# Altium PCB PCB1.PcbDoc
Units mil, origin at the board's own origin, x right, y up, seen from the top; angles counter-clockwise.
Board outline 1605 x 1020 mil, 4 copper layers (Top Layer, Int1 (GND), Int2 (PWR), Bottom Layer), stack 62.449 mil thick; 38 components, 33 nets, 142 pads, 58 vias.
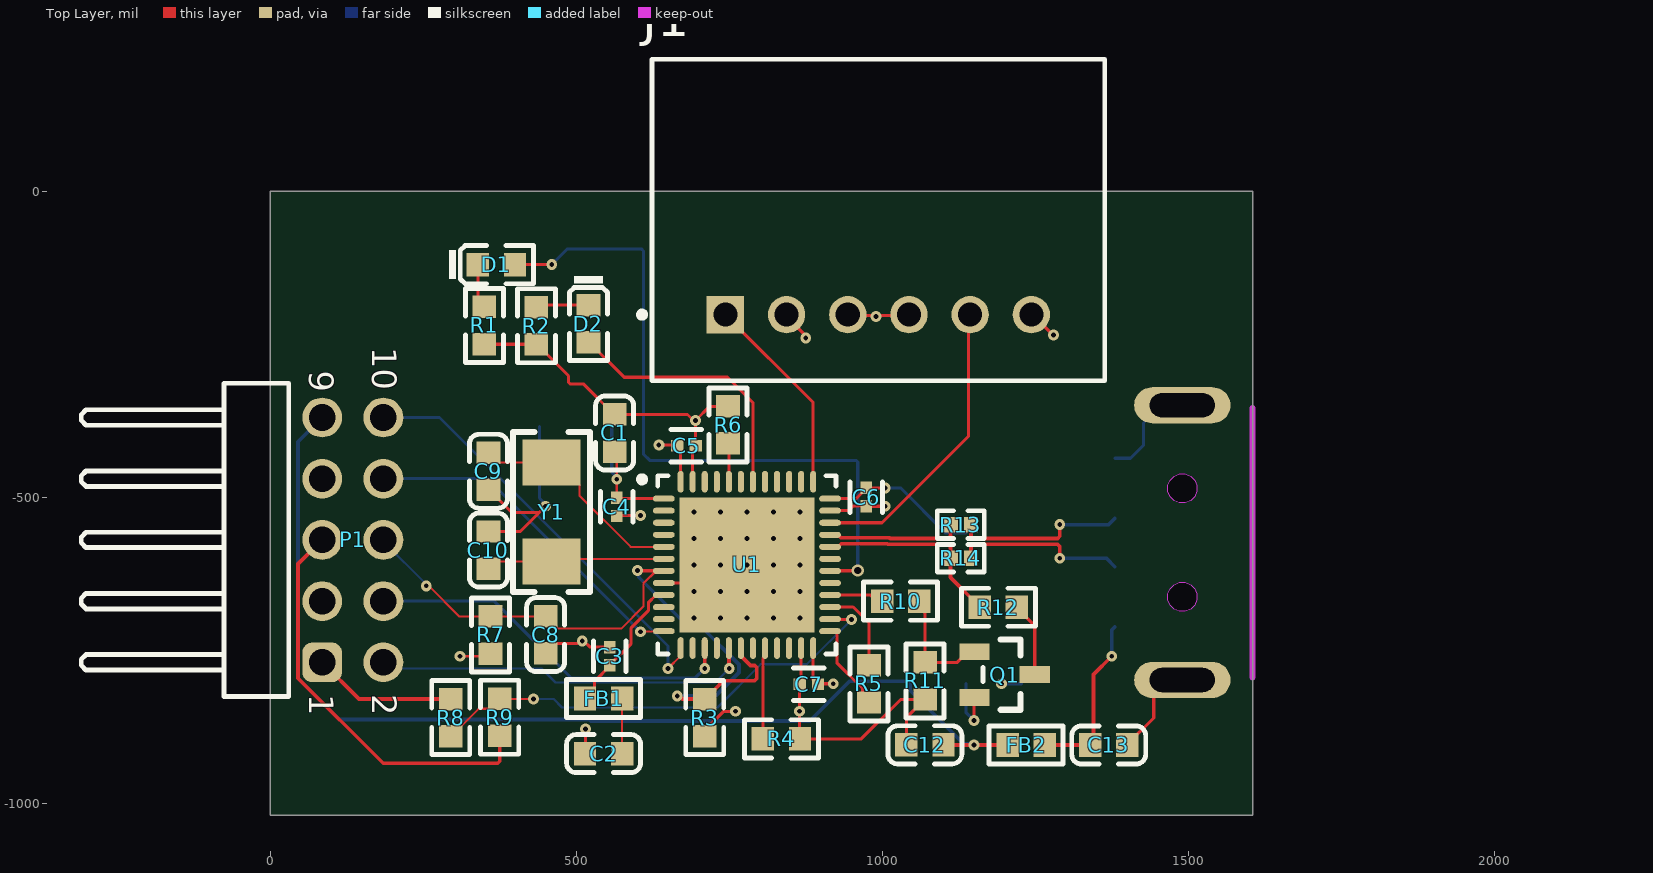
[diagram p0: Top Layer view]
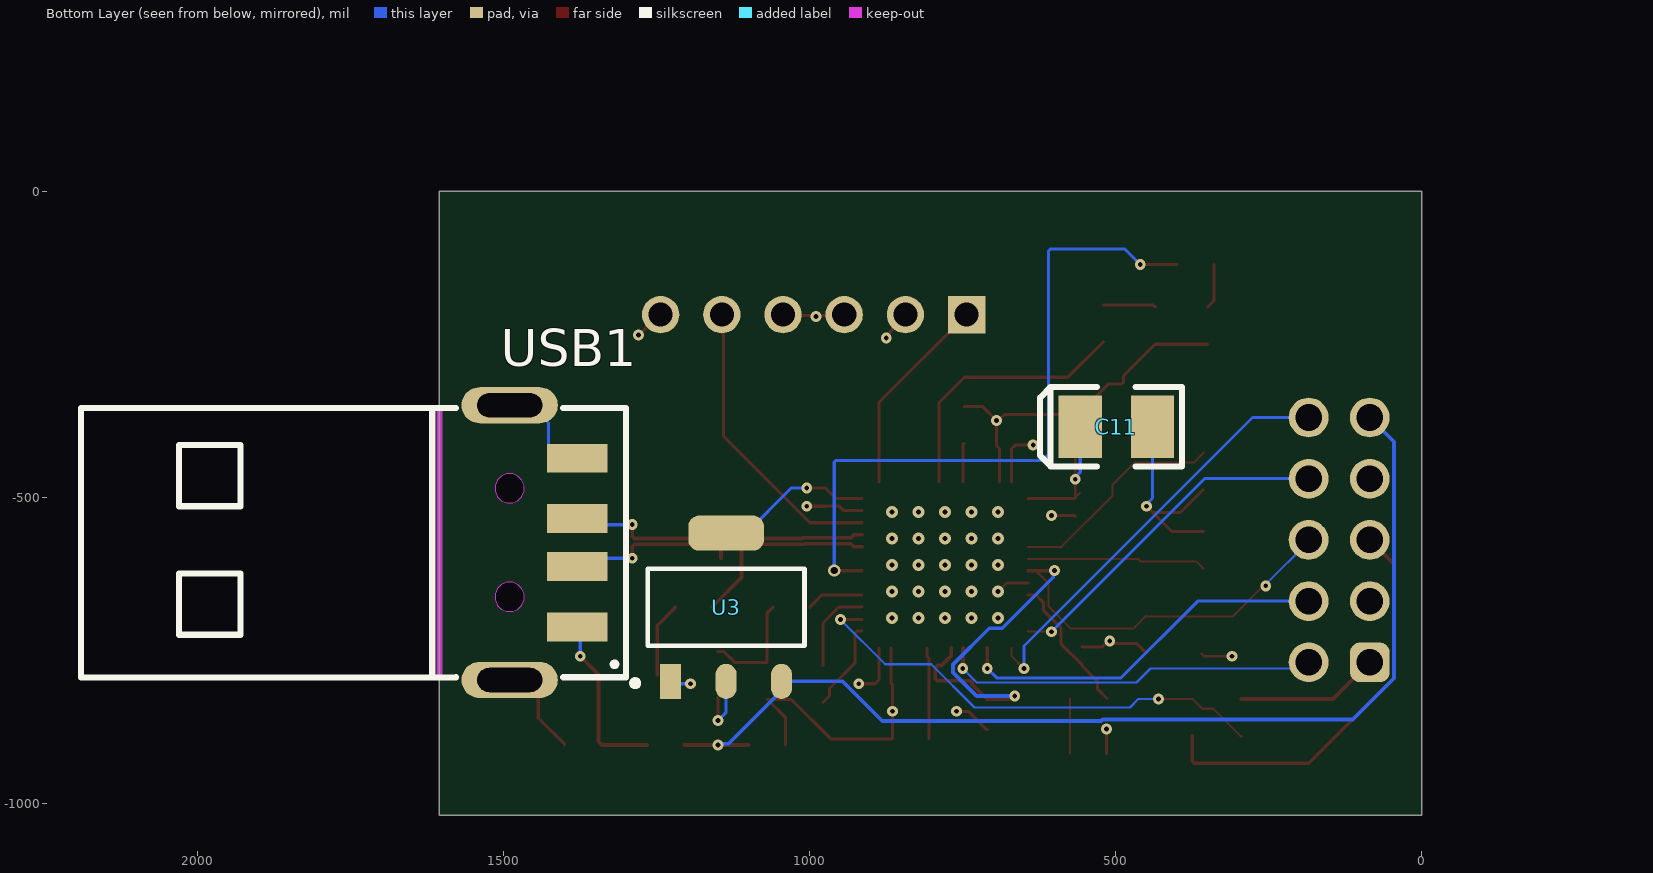
[diagram p1: Bottom Layer view, seen from below]
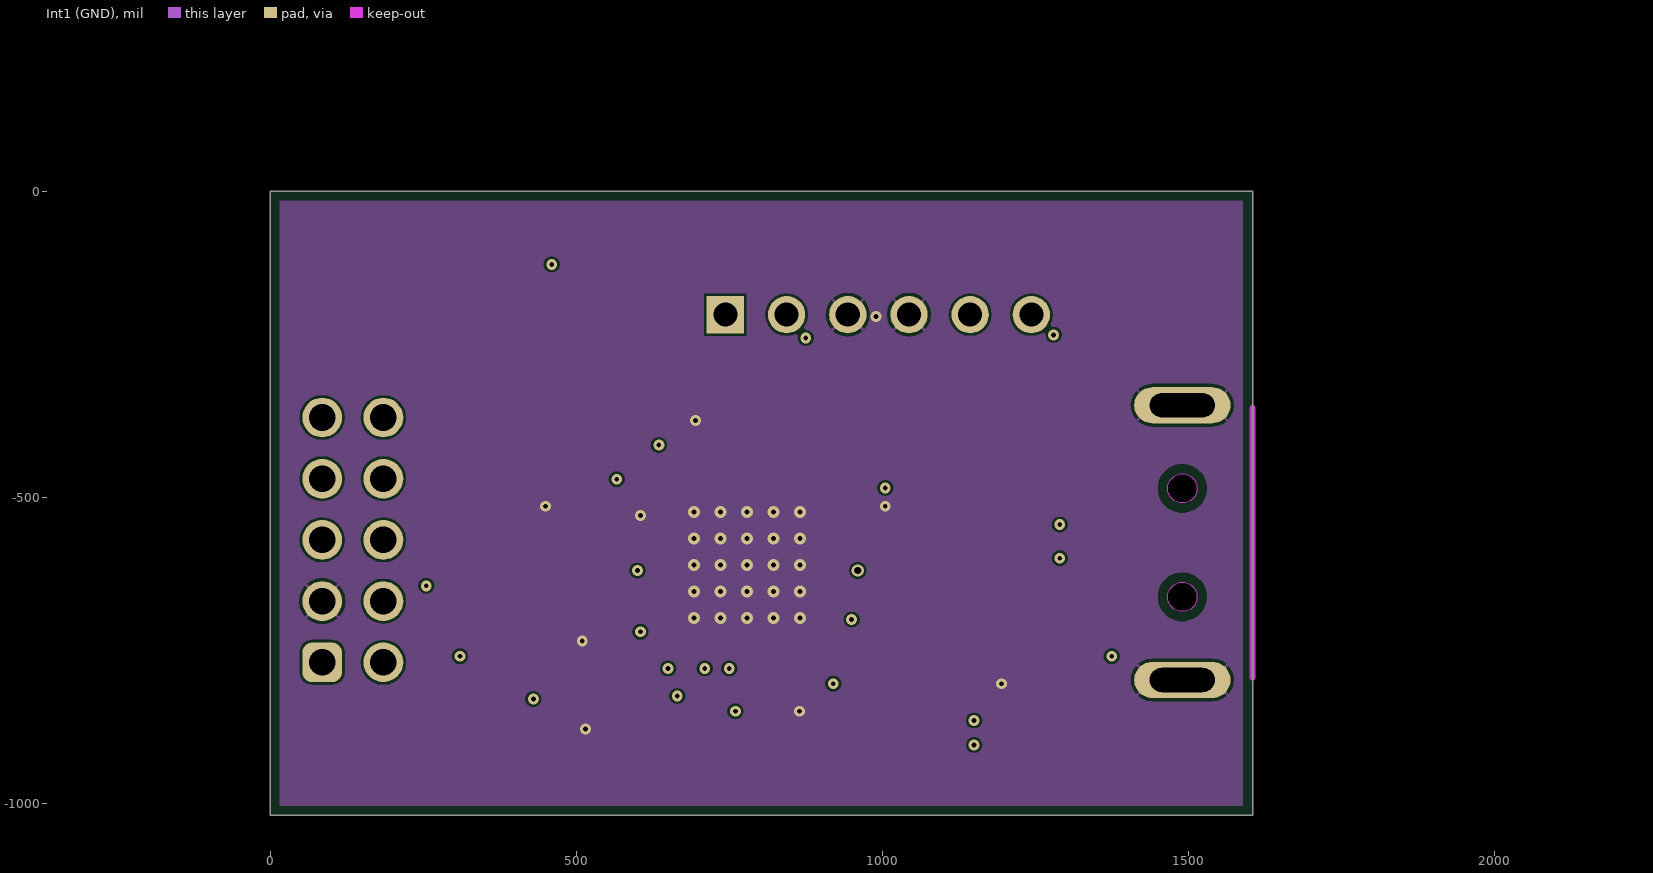
[diagram p2: Int1 (GND)]
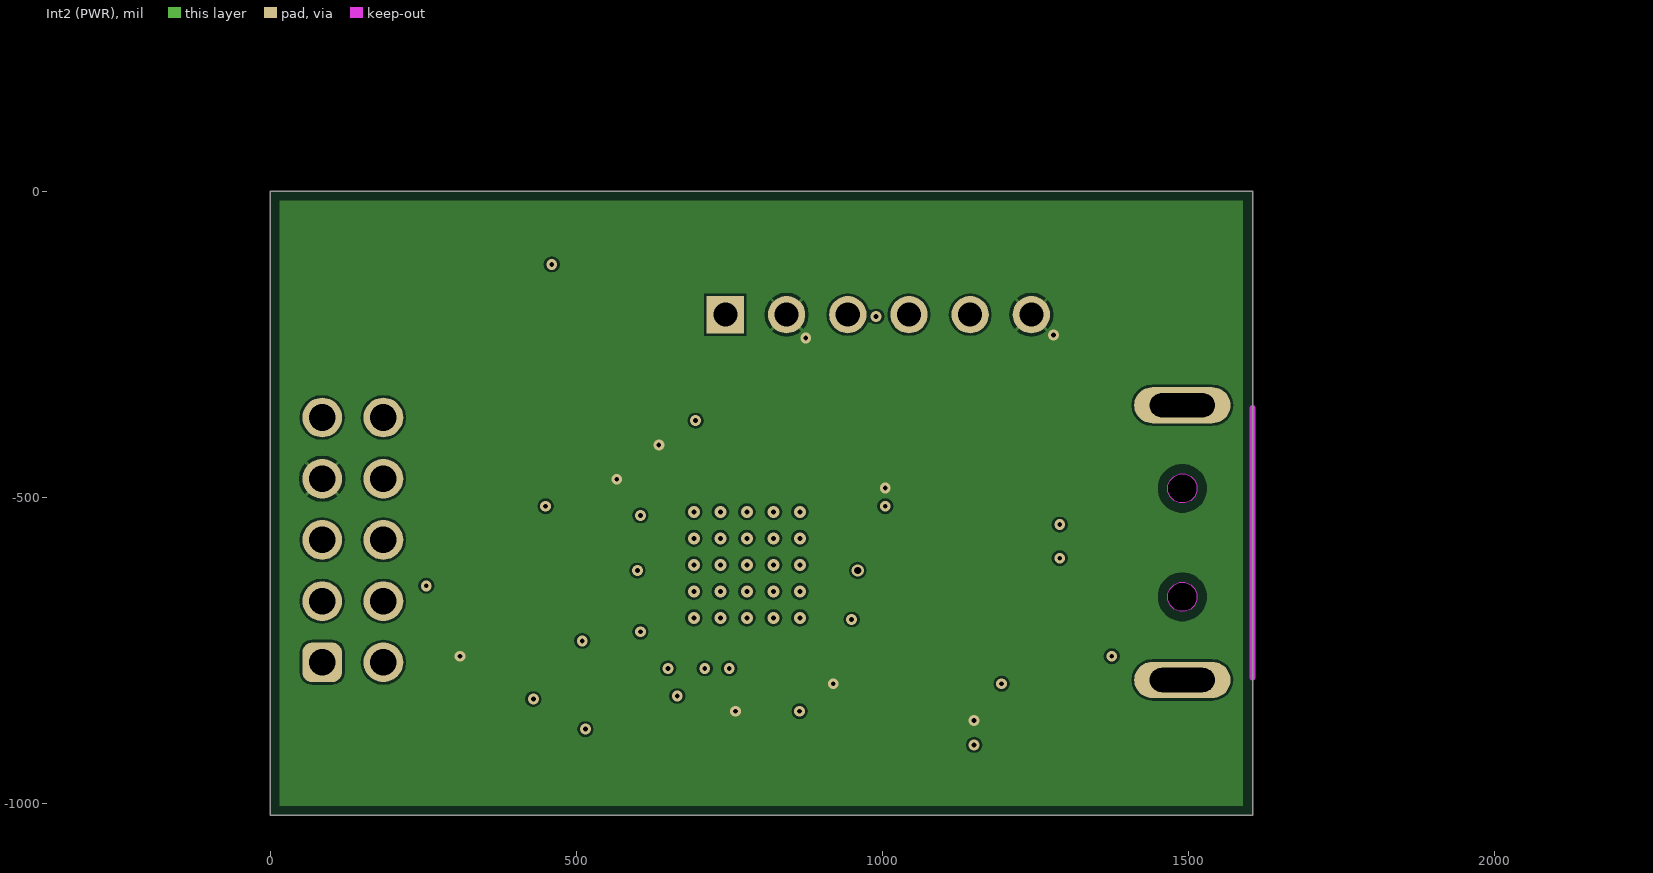
[diagram p3: Int2 (PWR)]
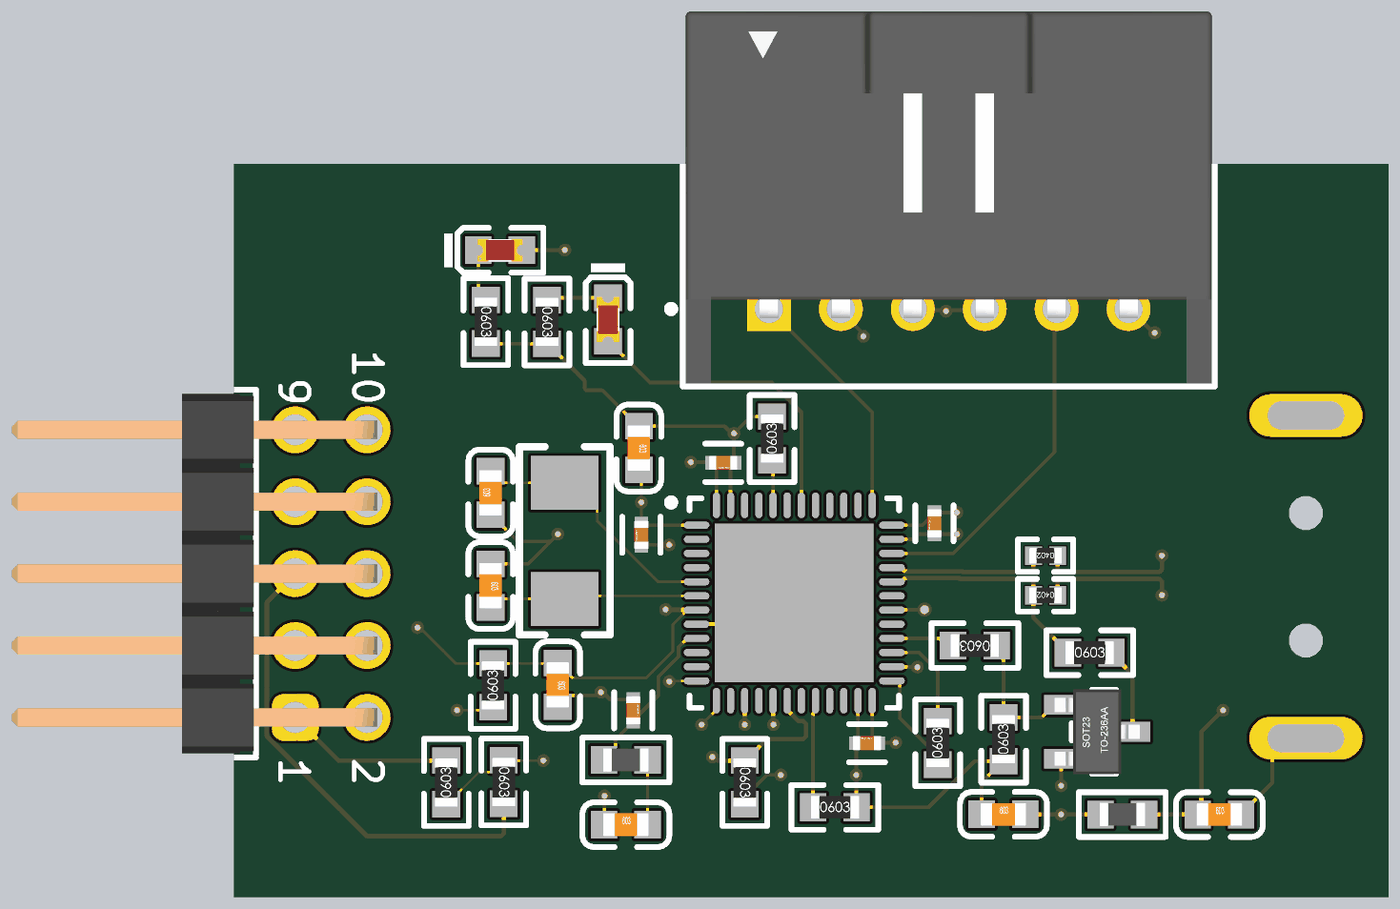
[diagram p4: 3D render of the assembled board from above, using the file's embedded part models]

## Layer stack, top to bottom
Top Solder: solder mask 0.6, SM-001, Dk 3.8
Top Layer: signal copper 1.378
Dielectric 1: prepreg 8.284, PP-017, Dk 4.5
Int1 (GND): signal copper 0.598
Dielectric 2: core 41.929, Core-039, Dk 4.48
Int2 (PWR): signal copper 0.598
Dielectric 3: prepreg 8.284, PP-017, Dk 4.5
Bottom Layer: signal copper 1.378
Bottom Solder: solder mask 0.6, SM-001, Dk 3.8

## Board outline
0,-1020 0,0 1605,0 1605,-1020

## Design rules (kind name [scope] priority, off if disabled: settings)
BoardOutlineClearance [All] p1: gap=15.75 ignorepadtopadclearanceinfootprint=FALSE
Clearance "Stitching No Net" [IsStitchingVia and InNet('No Net') vs (IsVia and (Not IsStitchingVia)) Or IsPad] p1: gap=5 ignorepadtopadclearanceinfootprint=FALSE
Clearance [All] p2: gap=3.94 ignorepadtopadclearanceinfootprint=TRUE except(0: Arc-Text Track-Text SMDPad-Text THPad-Text Via-Text Fill-Text Poly-Text Region-Text Text-Text; 3.5: Arc-Arc Arc-Track Track-Track)
ComponentClearance [All] p1: gap=0 collisioncheckmode=3 verticalgap=10 showdistances=FALSE checkcomponentboundary=TRUE
DiffPairsRouting usb [All] p1: maxlimit=5 minlimit=3.5 mostfreqgap=5 toplayer_maxgap=3.5 toplayer_prefgap=3.5 toplayer_minwidth=6.04 toplayer_maxwidth=6.04 toplayer_prefwidth=6.04 midlayer1_mingap=5 midlayer1_minwidth=6.05 midlayer1_maxwidth=6.05 midlayer1_prefwidth=6.05 midlayer2_mingap=5 midlayer2_minwidth=6.05 midlayer2_maxwidth=6.05 midlayer2_prefwidth=6.05 bottomlayer_maxgap=3.5 bottomlayer_prefgap=3.5 bottomlayer_minwidth=6.04 bottomlayer_maxwidth=6.04 bottomlayer_prefwidth=6.04 impedanceprofiledriven=TRUE impedanceprofileid={D8EC2194-7932-445D-939A-5E486EFC36D5} impedanceprofilevalue=90.000000 maxuncoupledlength=500
DiffPairsRouting [All] p2: maxlimit=10 minlimit=10 mostfreqgap=10 toplayer_minwidth=15 toplayer_maxwidth=15 toplayer_prefwidth=15 midlayer1_minwidth=15 midlayer1_maxwidth=15 midlayer1_prefwidth=15 midlayer2_minwidth=15 midlayer2_maxwidth=15 midlayer2_prefwidth=15 bottomlayer_minwidth=15 bottomlayer_maxwidth=15 bottomlayer_prefwidth=15 maxuncoupledlength=500
HoleSize [All] p1: absolutevalues=TRUE maxlimit=248.03 minlimit=7.87 maxpercent=80.000 minpercent=20.000
MinimumAnnularRing [All] p1: minimumring=5.91
MinimumSolderMaskSliver [All] p1: minsoldermaskwidth=3.94
PlaneClearance [All] p1: clearance=5
PlaneConnect [All] p1: pad.planeconnectstyle=Relief pad.reliefexpansion=5 pad.reliefentries=4 pad.reliefconductorwidth=5 pad.reliefairgap=5 via.planeconnectstyle=Direct via.reliefexpansion=20 via.reliefentries=4 via.reliefconductorwidth=10 via.reliefairgap=10
PolygonConnect [All] p1: thpad.connectstyle=Relief thpad.reliefconductorwidth=5 thpad.reliefentries=4 thpad.polygonreliefangle="45 Angle" thpad.airgapwidth=5 smdpad.connectstyle=Relief smdpad.reliefconductorwidth=5 smdpad.reliefentries=4 smdpad.polygonreliefangle="90 Angle" smdpad.airgapwidth=5 via.connectstyle=Direct via.reliefconductorwidth=10 via.reliefentries=4 via.polygonreliefangle="90 Angle" via.airgapwidth=10
RoutingVias [All] p1: holewidth=7.87 width=17.72 viastyle="Through Hole" minholewidth=7.87 minwidth=17.72 maxholewidth=39.37 maxwidth=78.74
SilkToSilkClearance [All] p1: silktosilkclearance=5.91
SilkToSolderMaskClearance [IsPad] p1: minsilkscreentomaskgap=5.91 clearancetoexposedcopper=TRUE
SolderMaskExpansion [All] p1: expansion=4 istentingtop=FALSE
Width [All] p1: maxlimit=100 minlimit=3.5 preferedwidth=5 midlayer1_prefwidth=3.5 midlayer2_prefwidth=3.5 minimp=50.000000 maximp=50.000000 favimp=50.000000
22 further rules are at their usual default settings.

## Classes and differential pairs
differential pair USB: +USB_P -USB_N
differential pair USB_CONN: +USB_CONN_P -USB_CONN_N

## Components (designator, comment, footprint, x,y, rotation, side; value= is the part's Value field where it differs from the comment)
C1 "10uF" 0603_C 562.75,-395.32 r270 top
C2 "1uF" 0603_C 544.68,-919.1 r0 top
C3 "100nF" FP-CL779-IPC_C 555,-760.1 r90 top
C4 "100nF" FP-CL779-IPC_C 566.22,-516.02 r270 top
C5 "100nF" FP-CL779-IPC_C 680.1,-415.93 r0 top
C6 "100nF" FP-CL779-IPC_C 973.79,-500 r270 top
C7 "100nF" FP-CL779-IPC_C 880.1,-805.72 r180 top
C8 "100nF" 0603_C 450,-724.68 r270 top
C9 "20pF" 0603_C 356.66,-457.86 r90 top
C10 "20pF" 0603_C 356.66,-586.61 r270 top
C11 "100uF" CASE-B_3528 499.05,-385 r0 bottom
C12 "10uF" 0603_C 1069.68,-904.73 r0 top
C13 "100nF" 0603_C 1370,-905 r0 top
D1 "红灯 0603" 0603_LED_S1 369.68,-120.27 r0 top
D2 "蓝灯 0603" 0603_LED_S1 520,-216.7 r270 top
FB1 "600Ω@100MHz" 0603_L 544.69,-829.1 r180 top
FB2 "600Ω@100MHz" 0603_L 1235,-905 r180 top
J1 "90136-2106" FP-90136-2106-MFG 993.66,-47.22 r180 top
P1 "61301021021" 61301021021 -22.48,-570 r270 top
Q1 "SS8550 Y2" SOT-23(SOT-23-3) 1200,-790 r180 top
R1 "10KΩ" 0603_R 350,-219.68 r270 top
R2 "10KΩ" 0603_R 435,-220 r270 top
R3 "10KΩ" 0603_R 710,-860.31 r270 top
R4 "10KΩ" 0603_R 835.31,-895 r0 top
R5 "100Ω" 0603_R 978.32,-805.32 r90 top
R6 "10KΩ" 0603_R 748.07,-382.08 r90 top
R7 "10KΩ" 0603_R 360,-725.32 r90 top
R8 "100Ω" 0603_R 295,-860.32 r90 top
R9 "100Ω" 0603_R 375,-859.68 r270 top
R10 "1.5KΩ" 0603_R 1030,-670 r180 top
R11 "1.5KΩ" 0603_R 1070,-800.32 r90 top
R12 "1.5KΩ" 0603_R 1189.68,-680 r0 top
R13 "22Ω" 0402_R 1128.27,-545 r180 top
R14 "22Ω" 0402_R 1128.27,-600 r180 top
U1 "STM32F103CBU6" STM-UFQFPN48_N 778.9,-610.83 r0 top
U3 "TLV1117-33CDCYR" FP-DCY0004A-IPC_C 1136.65,-680 r90 bottom
USB1 "U217-041N-4BV81" USB-A-SMD_U217-041N-4BV81 1435.12,-574.36 r270 bottom
Y1 "8MHz 20pF" SMD-5032_2P 459.7,-524.4 r270 top

## Footprints (in the part's own frame and the unit in brackets; to place one, negate y for a bottom-side part, rotate by r counter-clockwise, add the part's x,y. Pads: shape width x height; smd on the part's side, far side on the other; paste and mask are expansions set on the pad)
0402_R [mm]
  rect 0.6x0.65 smd mask+0.051: 1(-0.425,0) 2(0.425,0)
  silkscreen extent -0.97,-0.58 0.97,0.58, body extent -0.57,-0.27 0.58,0.28, height 0.41
0603_C [mm]
  rect 0.93x0.98 smd: 1(-0.77,0) 2(0.77,0)
  silkscreen extent -1.53,-0.79 1.54,0.79, body extent -0.8,-0.4 0.8,0.4, height 0.3
0603_L [mm]
  rect 0.93x0.98 smd: 1(-0.77,0) 2(0.77,0)
  silkscreen extent -1.53,-0.79 1.54,0.79, body extent -0.82,-0.41 0.83,0.41, height 0.46
0603_LED_S1 [mm]
  rect 0.93x0.98 smd: A(0.77,0) K(-0.77,0)
  silkscreen extent -1.97,-0.79 1.54,0.79, body extent -0.8,-0.4 0.8,0.4, height 0.6
0603_R [mm]
  rect 0.93x0.98 smd: 1(-0.77,0) 2(0.77,0)
  silkscreen extent -1.53,-0.79 1.54,0.79, body extent -0.85,-0.4 0.85,0.4, height 0.56
61301021021 [mm] "Pin Header, pitch 2.54 mm, THT, Angled, dual row, 10p"
  rrect50% 1.65x1.65 hole 1.1: 1(5.08,2.73)
  round 1.65 hole 1.1: 2(5.08,5.27) 3(2.54,2.73) 4(2.54,5.27) 5(0,2.73) 6(0,5.27) 7(-2.54,2.73) 8(-2.54,5.27) 9(-5.08,2.73) 10(-5.08,5.27)
  silkscreen extent -6.5,-7.27 6.5,1.35, body extent -6.35,-7.27 6.35,5.63, height 5.12
CASE-B_3528 [mm]
  rect 1.8x2.6 smd: 1(1.5,0) 2(-1.5,0)
  silkscreen extent -2.73,-1.65 3.16,1.65, body extent -1.85,-1.47 1.85,1.46, height 2.03
FP-90136-2106-MFG [mm]
  rect 1.55x1.55 hole 1 paste-1000 mask+0: 1(6.35,3.93)
  round 1.55 hole 1 paste-1000 mask+0: 2(3.81,3.93) 3(1.27,3.93) 4(-1.27,3.93) 5(-3.81,3.93) 6(-6.35,3.93)
  silkscreen extent -9.4,-6.67 9.93,6.67, body extent -9.5,-6.77 9.5,6.77, height 0.25
FP-CL779-IPC_C [mil]
  rect 20.29x18.6 smd paste+0 mask+0: 1(-14.9,0) 2(14.9,0)
  silkscreen extent -25,-27 25,27, body extent -29,-15 29,15, height 10
FP-DCY0004A-IPC_C [mm]
  rect 1.454x0.873 smd paste+0 mask+0: 1(-3.075,2.3)
  rrect100% 1.454x0.873 smd paste+0 mask+0: 2(-3.075,0) 3(-3.075,-2.3)
  rrect60% 1.454x3.132 smd paste+0 mask+0: 4(3.075,0)
  silkscreen extent -3.27,-3.25 1.6,3.9, body extent -3.5,-3.25 3.5,3.25, height 1.8
SMD-5032_2P [mm]
  rect 1.9x2.4 smd: 1(-2.05,0) 2(2.05,0)
  silkscreen extent -3.32,-1.6 3.32,1.6
SOT-23(SOT-23-3) [mm]
  rect 1.25x0.7 smd: 1(1.25,-0.95) 2(1.25,0.95) 3(-1.25,0)
  silkscreen extent -0.65,-1.46 0.9,1.46, body extent -1.5,-1.5 1.5,1.5, height 1.3
STM-UFQFPN48_N [mm] "QFN, 48-Leads, Body 7.1x7.1mm, Pitch 0.5mm, Thermal Pad 5.6x5.6mm, IPC Medium Density"
  oval 0.9x0.25 smd: 1(-3.45,2.75) 2(-3.45,2.25) 3(-3.45,1.75) 4(-3.45,1.25) 5(-3.45,0.75) 6(-3.45,0.25) 7(-3.45,-0.25) 8(-3.45,-0.75) 9(-3.45,-1.25) 10(-3.45,-1.75) 11(-3.45,-2.25) 12(-3.45,-2.75) 25(3.45,-2.75) 26(3.45,-2.25) 27(3.45,-1.75) 28(3.45,-1.25) 29(3.45,-0.75) 30(3.45,-0.25) 31(3.45,0.25) 32(3.45,0.75) 33(3.45,1.25) 34(3.45,1.75) 35(3.45,2.25) 36(3.45,2.75)
  oval 0.25x0.9 smd: 13(-2.75,-3.45) 14(-2.25,-3.45) 15(-1.75,-3.45) 16(-1.25,-3.45) 17(-0.75,-3.45) 18(-0.25,-3.45) 19(0.25,-3.45) 20(0.75,-3.45) 21(1.25,-3.45) 22(1.75,-3.45) 23(2.25,-3.45) 24(2.75,-3.45) 37(2.75,3.45) 38(2.25,3.45) 39(1.75,3.45) 40(1.25,3.45) 41(0.75,3.45) 42(0.25,3.45) 43(-0.25,3.45) 44(-0.75,3.45) 45(-1.25,3.45) 46(-1.75,3.45) 47(-2.25,3.45) 48(-2.75,3.45)
  rect 5.6x5.6 smd: 49(0,0)
  silkscreen extent -4.47,-3.7 3.7,3.7, body extent -3.55,-3.55 3.55,3.55, height 0.6
USB-A-SMD_U217-041N-4BV81 [mm]
  rect 1.2x2.5 smd paste-100 mask+0.051: 1(3.5,1.4) 2(1,1.4) 3(-1,1.4) 4(-3.5,1.4)
  oval 1.5x4 hole 1 slot 2.7 at 90 deg: 5(-5.7,-1.4) 6(5.7,-1.4)
  Keep-Out Layer board cut-out: 2.85,-1.4 2.85,-1.281 2.759,-1.06 2.59,-0.891 2.369,-0.8 2.131,-0.8 1.91,-0.891 1.741,-1.06 1.65,-1.281 1.65,-1.4 1.65,-1.519 1.741,-1.74 1.91,-1.909 2.131,-2 2.369,-2 2.59,-1.909 2.759,-1.74 2.85,-1.519 2.85,-1.4 2.85,-1.4
  Keep-Out Layer board cut-out: -1.65,-1.4 -1.65,-1.281 -1.741,-1.06 -1.91,-0.891 -2.131,-0.8 -2.369,-0.8 -2.59,-0.891 -2.759,-1.06 -2.85,-1.281 -2.85,-1.4 -2.85,-1.519 -2.759,-1.74 -2.59,-1.909 -2.369,-2 -2.131,-2 -1.91,-1.909 -1.741,-1.74 -1.65,-1.519 -1.65,-1.4 -1.65,-1.4
  Keep-Out Layer lines w0.254: 5.588,-4.318 -5.588,-4.318 5.588,-4.318
  Multi-Layer pour cut-out: 2.85,-1.4 2.85,-1.281 2.759,-1.06 2.59,-0.891 2.369,-0.8 2.131,-0.8 1.91,-0.891 1.741,-1.06 1.65,-1.281 1.65,-1.4 1.65,-1.519 1.741,-1.74 1.91,-1.909 2.131,-2 2.369,-2 2.59,-1.909 2.759,-1.74 2.85,-1.519 2.85,-1.4 2.85,-1.4
  Multi-Layer pour cut-out: -1.65,-1.4 -1.65,-1.281 -1.741,-1.06 -1.91,-0.891 -2.131,-0.8 -2.369,-0.8 -2.59,-0.891 -2.759,-1.06 -2.85,-1.281 -2.85,-1.4 -2.85,-1.519 -2.759,-1.74 -2.59,-1.909 -2.369,-2 -2.131,-2 -1.91,-1.909 -1.741,-1.74 -1.65,-1.519 -1.65,-1.4 -1.65,-1.4
  silkscreen extent -5.59,-19.18 5.6,3.43

## Part data
C1 C12: library part "0603 10uF (106) 10% 10V", "贴片电容", Package=0603, SuppliersPartNumber=C19702, ComponentLink1Description=供应商链接, ComponentLink1URL=http://www.szlcsc.com/product/details_20411.html, Supplier=LC
C2: library part "0603 1uF (105) 10% 50V", "贴片电容1uF (105) 10% 50V CL10A105KB8NNNC", Package=0603, SuppliersPartNumber=C15849, ComponentLink1Description=供应商链接, ComponentLink1URL=http://www.szlcsc.com/product/details_16531.html, Supplier=LC
C3 C4 C5 C6 C7: library part CMP-13271-002336-1, "CL05B104KB54PNC Cap Ceramic 100nF 50V X7R ±10% SMD 0402 +125°C Paper T/R"
C8 C13: library part "0603 100nF (104) 10% 50V", "贴片电容", Package=0603, SuppliersPartNumber=C14663, ComponentLink1Description=供应商链接, ComponentLink1URL=http://www.szlcsc.com/product/details_15331.html, Supplier=LC
C9 C10: library part "0603 20pF (200) 5% 50V", "贴片电容", Package=0603, SuppliersPartNumber=C1648, ComponentLink1Description=供应商链接, ComponentLink1URL=http://www.szlcsc.com/product/details_2000.html, Supplier=LC
C11: library part "3528 100uF (107) 10% 6.3V", "钽电容", Package=3528, SuppliersPartNumber=C16133, ComponentLink1Description=供应商链接, ComponentLink1URL=http://www.szlcsc.com/product/details_16815.html, Supplier=LC
D1: library part "0603 红灯", "发光二极管", Package=0603, SuppliersPartNumber=C2286, ComponentLink1Description=供应商链接, ComponentLink1URL=http://www.szlcsc.com/product/details_2659.html, Supplier=LC
D2: library part "0603 蓝灯", "发光二极管", Package=0603, SuppliersPartNumber=C72041, ComponentLink1Description=供应商链接, ComponentLink1URL=http://www.szlcsc.com/product/details_73150.html, Supplier=LC
FB1 FB2: library part "0603 600Ω 25% 100MHz", "贴片磁珠GZ1608D601TF", Package=0603, SuppliersPartNumber=C1002, ComponentLink1Description=供应商链接, ComponentLink1URL=http://www.szlcsc.com/product/details_1354.html, Supplier=LC
J1: library part CMP-04776-000069-1, "CONN HEADER R/A 6POS 2.54MM", Current Rating=3A, Manufacturer=Molex, Package=0, Temperature="-55°C to +125°C", Temperature Range High=+125°C, Temperature Range Low=-55°C, Voltage Rating=350V, Automotive=No, Category=Conn, ComponentLink2Description=Datasheet, ComponentLink2URL=http://www.molex.com/webdocs/datasheets/pdf/en-us/0901362106_PCB_HEADERS.pdf, Conn Gender=Male, Conn Orientation="Right Angle", Contact Material=Tin,Nickel, Device Class L1=Connectors, Device Class L2="Headers and Wire Housings", Device Class L3=unset, Digikey Description="CONN HEADER R/A 6POS 2.54MM", Footprint Url=https://www.molex.com/pdm_docs/sd/901362106_sd.pdf, Height=7.51mm, Lead Free=Yes, Manufacturer Part Number=90136-2106, Mouser Description="Headers & Wire Housings 2.54MM CGRIDIII HDR 6P R/A SR SHRD TIN", Number Of Contacts=6, Number Of Rows=1, Octopart=https://octopart.com/90136-2106-molex-655558, Pitch=2.54mm, RoHS=TRUE
P1: library part CMP-1502-01083-2, Color=Black, Contact Resistance=20mΩ, Current Rating=3A, Flammability Rating="UL94 V-0", Insulation Resistance=1GΩ, Max Operating Temperature=125°C, Min Operating Temperature=-40°C, Operating Supply Voltage=250V, Connector Type="Male Pin", Contact Gender=Male, Contact Material=Copper, Contact Mating Length=5.9944mm, Contact Plating=Gold, Gender=Male, Height=2.54mm, Housing Material=PBT, Insulation=Insulated, Lead Pitch=2.54mm, Length=12.7mm, Mount="Through Hole", NexarPartId=18818162, Number Of Contacts=10, Number of Pins=10, Number of Positions=10, Number Of Rows=2, Orientation="Right Angle", Packaging=Bulk, Pitch=2.54mm, REACH SVHC=Unknown, RoHS=Compliant, Row Spacing=2.54mm, Termination="Through Hole", Voltage Rating=250V, Width=12.7mm
Q1: library part "SOT-23 SS8550 Y2", "三极管", Package=SOT-23, SuppliersPartNumber=C8542, ComponentLink1Description=供应商链接, ComponentLink1URL=http://www.szlcsc.com/product/details_9037.html, Supplier=LC
R1 R2 R6 R7: library part "0603 10KΩ (1002) 1%", "贴片电阻", Package=0603, SuppliersPartNumber=C25804, ComponentLink1Description=供应商链接, ComponentLink1URL=http://www.szlcsc.com/product/details_26547.html, Supplier=LC
R3 R4: library part "0603 10KΩ (1002) 1%", "贴片电阻 0603WAF1002T5E", Package=0603, SuppliersPartNumber=C25804, ComponentLink1Description=供应商链接, ComponentLink1URL=http://www.szlcsc.com/product/details_26547.html, Supplier=LC
R5 R8 R9: library part "0603 100Ω (1000) 1%", "贴片电阻", Package=0603, SuppliersPartNumber=C22775, ComponentLink1Description=供应商链接, ComponentLink1URL=http://www.szlcsc.com/product/details_23502.html, Supplier=LC
R10 R11 R12: library part "0603 1.5KΩ (1501) 1%", "贴片电阻", Package=0603, SuppliersPartNumber=C22843, ComponentLink1Description=供应商链接, ComponentLink1URL=http://www.szlcsc.com/product/details_23570.html, Supplier=LC
R13 R14: library part "0402 22Ω (22R0) 1%", "贴片电阻", Package=0402, SuppliersPartNumber=C25092, ComponentLink1Description=供应商链接, ComponentLink1URL=http://www.szlcsc.com/product/details_25835.html, Supplier=LC
U1: library part CMP-0237-00051-3, "ARM Cortex-M3 32-bit MCU, 128 KB Flash, 20 KB Internal RAM, 37 I/Os, 48-pin UFQFPN, -40 to 85 degC, Tray", I/Os (High Current)=37, Operating Frequency(F) (Processor speed) (MHz)=72, Supply Voltage(Vcc) min (V)=2, A/D Converter="2x12-bit (10 Channel)", ComponentLink1Description="Manufacturer URL", ComponentLink1URL=http://www.st.com/web/en/home.html, ComponentLink2Description=Datasheet, ComponentLink2URL=http://www.st.com/st-web-ui/static/active/en/resource/technical/document/datasheet/CD00161566.pdf, ComponentLink3Description="Package Specification", ComponentLink3URL=http://www.st.com/st-web-ui/static/active/en/resource/technical/document/data_brief/DM00071938.pdf, Core="ARM Cortex-M3", DatasheetVersion="Rev. 16", FLASH Size (Prog) (kB)=128, Internal RAM Size (kB)=20, Mounting Technology="Surface Mount", PackageDescription="48-Pin Ultra Thin Fine Pitch Quad Flat No-Lead, 7 x 7 x 0.6 mm Body, 0.5 mm Pitch, Exposed Pad", PackageReference=UFQFPN48, PackageVersion="Rev. 1, 04/2013", Packing=Tray, PartNumber=STM32F103CBU6
U3: library part CMP-04917-000080-1, "IC REG LIN 3.3V 800MA SOT223-4"
USB1: Current Rating - Power (Max)=1.5A, JLCPCB Part Class="Extended Part", LCSC Part Name="Type-A 公头 沉板", Manufacturer="XKB Connectivity(中国星坤)", Operating Temperature Range=-40℃~+85℃, Welding Temperature (Max)=-, Add into BOM=yes, Connector Type=Type-A, Contact Material=黄铜, Contact Plating=金, Convert to PCB=yes, Datasheet=https://atta.szlcsc.com/upload/public/pdf/source/20211015/D42E73CBE112FBE216C7DAC502068881.pdf, Device=U217-041N-4BV81, Gender=公头, Manufacturer Part=U217-041N-4BV81, Mounting Style=沉板, Name=U217-041N-4BV81, Number Of Contacts=4P, Number of Ports=1, Standard="USB 2.0", Supplier=LCSC, Supplier Footprint=SMD, Supplier Part=C319178, Symbol=U217-04XN-XXR84
Y1: library part "SMD-5032_2P 8MHz 20ppm 20pF", "贴片晶振", Package=SMD-5032_2P, SuppliersPartNumber=C115962, ComponentLink1Description=供应商链接, ComponentLink1URL=http://www.szlcsc.com/product/details_117214.html, Supplier=LC

## Via types
v1: diameter 17.72, hole 7.87, Top Layer to Bottom Layer, tented both sides, 32 vias
v2: diameter 19.68, hole 7.87, Top Layer to Bottom Layer, 25 vias
v3: diameter 19.68, hole 11.81, Top Layer to Bottom Layer, tented both sides, 1 vias

## Nets (pads, with @x,y where several pads share a name; then routed paths per layer and width w, separated by ;. In a path a pad name is that pad's centre, name@x,y a point inside that pad or via, vN(x,y) a via of type N, cw(c..) or ccw(c..) an arc to the next point about the centre after c; other vN are vias at no path point)
3v3: C1.2 C4.1 C5.1 C6.1 C7.1 C11.1 J1.2 J1.6 P1.7 Q1.2 R3.2 R7.1 U1.1 U1.24 U1.36 U1.48 U3.2 U3.4 | length 1016.6
  Top Layer w3.5: v1(310,-760) 355.63,-760 R7.1 ; C4.1@558.67,-493.47 C4.1@566.22,-501.02 ; C1.2 566.22,-429.11 v1(566.22,-470.93) C4.1@566.22,-501.02 ; C4.1@567.66,-502.56 C4.1 C4.1@566.22,-501.02 ; U1.48 U1.48@671.84,-473.79
  Top Layer w5: C4.1@566.22,-501.02 567.77,-502.56 U1.1 ; v1(635,-415) 664.26,-415 C5.1 670.63,-421.37 U1.48 ; R3.2@710,-879.89 710.98,-879.89 740.88,-850 v1(760,-850) ; J1.2 843.66,-205.31 875,-236.64 v1(875,-240) ; U1.24 887.17,-798.73 893.44,-805 v1(920,-805) ; U1.36 957.17,-502.56 973.79,-485.94 C6.1 973.89,-485 v1(1005,-485) ; v1(1150,-865) 1150,-828.19 Q1.2 ; J1.6 1245.31,-201.95 1278.36,-235 v1(1280,-235)
  Bottom Layer w5: C11.1 558.11,-459.37 566.22,-467.49 v1(566.22,-470.93) ; v1(1005,-485) 1029.68,-485 1103.61,-558.94 U3.4 ; U3.2@1136.49,-805 1136.49,-851.49 v1(1150,-865)
3v3A: C3.1 FB1.2 U1.9 | length 229.9
  Top Layer w5: FB1.2 530.18,-813.3 530.18,-800.67 555,-775.84 C3.1 555,-774.16 589.7,-739.45 589.7,-713.66 617.82,-685.55 617.82,-672.5 630.28,-660.04 U1.9
BOOT0: R6.1 U1.44 | length 63.1
  Top Layer w5: R6.1 749.37,-413.69 U1.44
BOOT1: R4.1 U1.20 | length 149.8
  Top Layer w5: R4.1 805,-764.18 808.43,-760.76 U1.20
GND: C1.1 C2.1 C3.2 C4.2 C5.2 C6.2 C7.2 C8.2 C9.1 C10.1 C11.2 C12.1 C13.2 J1.3 J1.4 P1.3 R1.2 R2.2 R4.2 R6.2 R11.1 U1.8 U1.23 U1.35 U1.47 U1.49 U3.1 USB1.4 USB1.5 USB1.6 | length 2180.4
  Top Layer w5: R1.2 350.32,-250.32 R2.2 435.98,-250.32 487.57,-301.9 487.57,-312.57 490,-315 511.76,-315 561.76,-365 C1.1 681.87,-365 691.87,-375 v1(695,-375) ; C10.1 408.7,-556.3 439.88,-525.12 ; C9.1 357.65,-488.18 394.58,-525.12 439.88,-525.12 ; C8.2 465.81,-739.19 502.37,-739.19 506.56,-735 v1(510,-735) 512.75,-735 522.94,-745.19 C3.2 ; v1(450,-515) 439.88,-525.12 ; C2.1@515,-918.47 v1(515,-879.1) ; C4.2 567.15,-530 v1(605,-530) ; U1.8 678.5,-640.35 v2(692.28,-654.13) ; U1.47 690.32,-420.62 C5.2 v1(695,-375) ; R6.2 718.24,-351.76 v1(695,-375) ; U1.23 867.48,-803.43 C7.2 865,-805.91 v1(865,-850) 865,-894.37 R4.2 965.65,-895 1030.02,-830.63 R11.1@1069.02,-830.63 ; U1.35 944.24,-522.24 951.58,-514.9 C6.2 973.89,-515 v1(1005,-515) ; J1.3 945.19,-203.47 988.47,-203.47 v1(990,-205) 991.53,-203.47 1042.14,-203.47 J1.4 ; C12.1 1039.37,-860.28 R11.1@1069.02,-830.63 ; R11.1 R11.1@1069.02,-830.63 ; C13.2 1400.32,-904.02 1443.53,-860.8 1443.53,-823.74 1468.5,-798.77 USB1.6
  Bottom Layer w5: C11.2 440,-501.87 450,-511.87 v1(450,-515) ; v1(1195,-805) U3.1@1227.04,-805 ; USB1.4 1405.59,-436.57 1426.71,-415.45 1426.71,-378.9 1455.65,-349.96 USB1.5
  other v2: 692.28,-697.44 735.59,-697.44 778.9,-697.44 822.2,-697.44 865.51,-697.44 735.59,-654.13 778.9,-654.13 822.2,-654.13 865.51,-654.13 692.28,-610.83 735.59,-610.83 778.9,-610.83 822.2,-610.83 865.51,-610.83 692.28,-567.52 735.59,-567.52 778.9,-567.52 822.2,-567.52 865.51,-567.52 692.28,-524.21 735.59,-524.21 778.9,-524.21 822.2,-524.21 865.51,-524.21
LED_CON: D2.A U1.42 | length 438.9
  Top Layer w5: D2.A 520.98,-247.01 578.25,-304.28 747.28,-304.28 788.74,-345.73 U1.42
LED_RUN: D1.A U1.30 | length 1131.7
  Top Layer w5: D1.A 400.27,-120 v1(460,-120) ; U1.30 915.06,-620.33 959.67,-620.33 v3(960,-620)
  Bottom Layer w5: v1(460,-120) 485,-95 607.07,-95 610,-97.93 610,-430 620,-440 957.07,-440 960,-442.93 v3(960,-620)
NetC2_2: C2.2 FB1.1 | length 90
  Top Layer w3.5: C2.2 FB1.1
NetD1_K: D1.K R1.1 | length 73.5
  Top Layer w5: D1.K 339.37,-178.74 R1.1
NetD2_K: D2.K R2.1 | length 86.4
  Top Layer w5: R2.1 438.3,-186.38 D2.K
NetQ1_1: Q1.1 R10.1 R11.2 | length 182.1
  Top Layer w5: R10.1@1060,-680 1070,-690 R11.2 1122.56,-770 1139.96,-752.6 Q1.1
NetQ1_3: Q1.3 R12.2 | length 122.1
  Top Layer w6.04: R12.2 1220,-680.98 1249.21,-710.2 Q1.3
nRST: C8.1 P1.6 R3.1 R7.2 U1.7 U1.18 | length 1205.7
  Top Layer w3.5: v1(255,-645) 258.85,-645 308.85,-695 R7.2 449.37,-695 C8.1 450.98,-694.37 467.54,-710.93 467.54,-711.91 470.63,-715 573.39,-715 610.07,-678.32 610.07,-640.88 630.28,-620.67 U1.7
  Top Layer w5: U1.18 U1.18@769.53,-747.13
  Top Layer w6.04: v1(600,-620) 600.33,-620.33 642.74,-620.33 U1.7 ; v1(665,-825) 668.16,-825 673.16,-830 R3.1 710.98,-830 735,-805.98 735,-800 791.46,-800 795,-796.46 795,-778.54 791.46,-775 784.61,-775 769.06,-759.45 U1.18
  Bottom Layer w3.5: P1.6 185,-572.5 255,-642.5 v1(255,-645)
  Bottom Layer w6.04: v1(600,-620) 602.24,-622.24 602.24,-631.15 685.33,-714.24 706.6,-714.24 765.81,-773.45 765.81,-786.55 727.36,-825 v1(665,-825)
OSC_IN: C9.2 U1.5 Y1.1 | length 360.7
  Top Layer w3.5: C9.2 372.8,-443.69 Y1.1 469.55,-443.69 505.2,-479.34 505.2,-497.39 589.11,-581.3 U1.5
OSC_OUT: C10.2 U1.6 Y1.2 | length 293
  Top Layer w3.5: C10.2 368.48,-605.11 Y1.2 463.83,-600.98 U1.6
SWCLK: J1.1 U1.37 | length 332.5
  Top Layer w5: J1.1 887.17,-345.45 U1.37
SWDIO: J1.5 U1.34 | length 484.6
  Top Layer w5: U1.34 999.7,-541.93 1140.77,-400.86 1140.77,-204.84 J1.5
TCK_SWCLK: R8.1 R9.1 U1.26 | length 781.3
  Top Layer w3.5: R8.1 295.98,-890.63 340.69,-845.93 358.44,-845.93 R9.1 375.63,-830 v1(430,-830) ; U1.26 U1.26@915.02,-699.7 ; v1@949.7,-699.7 v1(950,-700)
  Top Layer w5: U1.26@915.02,-699.7 v1@949.7,-699.7
  Bottom Layer w3.5: v1(430,-830) 463.11,-830 476.76,-843.65 730.78,-843.65 801.24,-773.18 876.82,-773.18 v1(950,-700)
TCK_SWCLK_CONN: P1.1 R8.2 | length 234.9
  Top Layer w6.04: P1.1 145,-830 R8.2
TDI: P1.2 U1.17 | length 621.8
  Top Layer w6.04: U1.17 749.69,-746.97 749.69,-779.69 v1(750,-780)
  Bottom Layer w3.5: P1.2 195,-780 443.25,-780 466.3,-803.05 726.95,-803.05 v1(750,-780)
TDO: P1.4 U1.15 | length 616.6
  Top Layer w6.04: v1(710,-780) U1.15
  Bottom Layer w5: P1.4 366.13,-670 491.43,-795.3 694.7,-795.3 v1(710,-780)
TMS_SWDIO: R5.2 U1.27 | length 143.7
  Top Layer w5: U1.27 952.39,-679.72 978.32,-705.65 R5.2
TMS_SWDIO_CONN: P1.5 R9.2 | length 672.2
  Top Layer w6.04: P1.5 45.57,-609.43 45.57,-795.85 184.72,-935 371.46,-935 375,-931.46 R9.2
TMS_SWDIO_UP: R5.1 U1.25 | length 147.6
  Top Layer w5: U1.25 922.84,-719.09 925.77,-722.02 925.77,-770.77 967.75,-812.75 967.75,-825.06 R5.1
UART2_RX: P1.10 U1.13 | length 698.2
  Top Layer w3.5: v1(650,-780) 670.63,-759.41 U1.13
  Bottom Layer w5: P1.10 276.63,-370 650,-743.37 v1(650,-780)
UART2_TX: P1.8 U1.12 | length 562
  Top Layer w3.5: v1(605,-720) 605.45,-719.55 642.62,-719.55 U1.12
  Bottom Layer w5: P1.8 355,-470 v1(605,-720)
USB_CONN_N: R14.1 USB1.2 | length 282
  Top Layer w6.04: R14.1 1145,-580.8 1148.54,-577.27 1286.46,-577.27 1290,-580.8 v1(1290,-600)
  Bottom Layer w6.04: v1(1290,-600) 1366.26,-600 USB1.2
USB_CONN_P: R13.1 USB1.3 | length 280.5
  Top Layer w6.04: R13.1 1145,-564.2 1148.54,-567.73 1286.46,-567.73 1290,-564.2 v1(1290,-545)
  Bottom Layer w6.04: v1(1290,-545) 1370,-545 USB1.3
USB_ENUM: R10.2 U1.28 | length 93.5
  Top Layer w5: U1.28 980.39,-660.04 999.37,-679.02 R10.2@999.37,-680
USB_N: R12.1 R14.2 U1.32 | length 319.8
  Top Layer w6.04: U1.32 927.88,-581.3 932.96,-576.22 1007.84,-576.22 1008.88,-577.27 1108,-577.27 1111.54,-580.8 R14.2 1111.54,-631.18 1159.37,-679.02 R12.1
USB_P: R13.2 U1.33 | length 220
  Top Layer w6.04: U1.33 927.88,-561.61 932.96,-566.69 1011.79,-566.69 1012.83,-567.73 1108,-567.73 1111.54,-564.2 R13.2
VBUS: C12.2 FB2.2 P1.9 U3.3 | length 1755.5
  Top Layer w6.04: C12.2 1100.27,-905 v1(1150,-905) FB2.2
  Bottom Layer w6.04: P1.9 45.57,-409.43 45.57,-795.85 113.01,-863.29 521.55,-863.29 524.07,-865.81 881.55,-865.81 946.3,-801.06 U3.3 ; U3.3@1045.93,-805 1045.93,-816.43 1132.27,-902.76 1147.76,-902.76 v1(1150,-905)
VBUS_FB: C13.1 FB2.1 USB1.1 | length 283.9
  Top Layer w6.04: FB2.1 C13.1 1345,-899.68 1345,-790 v1(1375,-760)
  Bottom Layer w6.04: v1(1375,-760) 1375,-717.16 USB1.1
pads on no net: U1.2 U1.3 U1.4 U1.10 U1.11 U1.14 U1.16 U1.19 U1.21 U1.22 U1.29 U1.31 U1.38 U1.39 U1.40 U1.41 U1.43 U1.45 U1.46

## Polygon pours and split planes (outlines as drawn)
GND on Int1 (GND) "GND_L02_P000" (solid, pour order 0): -1345,-2205 4655,-2205 4655,1795 -1345,1795
3v3 on Int2 (PWR) "3V3_L03_P001" (solid, pour order 1): -1345,-2205 4655,-2205 4655,1795 -1345,1795

## Silkscreen, mask and mechanical layers (free items; w line width, h text height)
Mechanical 1:
  lines w10: 0,-1020 1605,-1020 1605,-941.25 1605,-843.75 1605,-750 1605,-270 1605,-176.25 1605,-78.75 1605,0 0,0 0,-1020

## Text inside footprints (layer, text, board x,y; h text height)
P1: Top Overlay "10" at 166.5,-255.04 h40 r270; Top Overlay "9" at 64.13,-294.02 h40 r270; Top Overlay "1" at 64.13,-822.36 h40 r270; Top Overlay "2" at 166.5,-822.36 h40 r270